# Altium PCB RevB.PcbDoc
Units mm, origin at the board's own origin, x right, y up, seen from the top; angles counter-clockwise.
Board outline 45 x 45 mm, 2 copper layers (Top Layer, Bottom Layer); 73 components, 78 nets, 294 pads, 41 vias.
Unrouted connection lines stored in the file: 18.
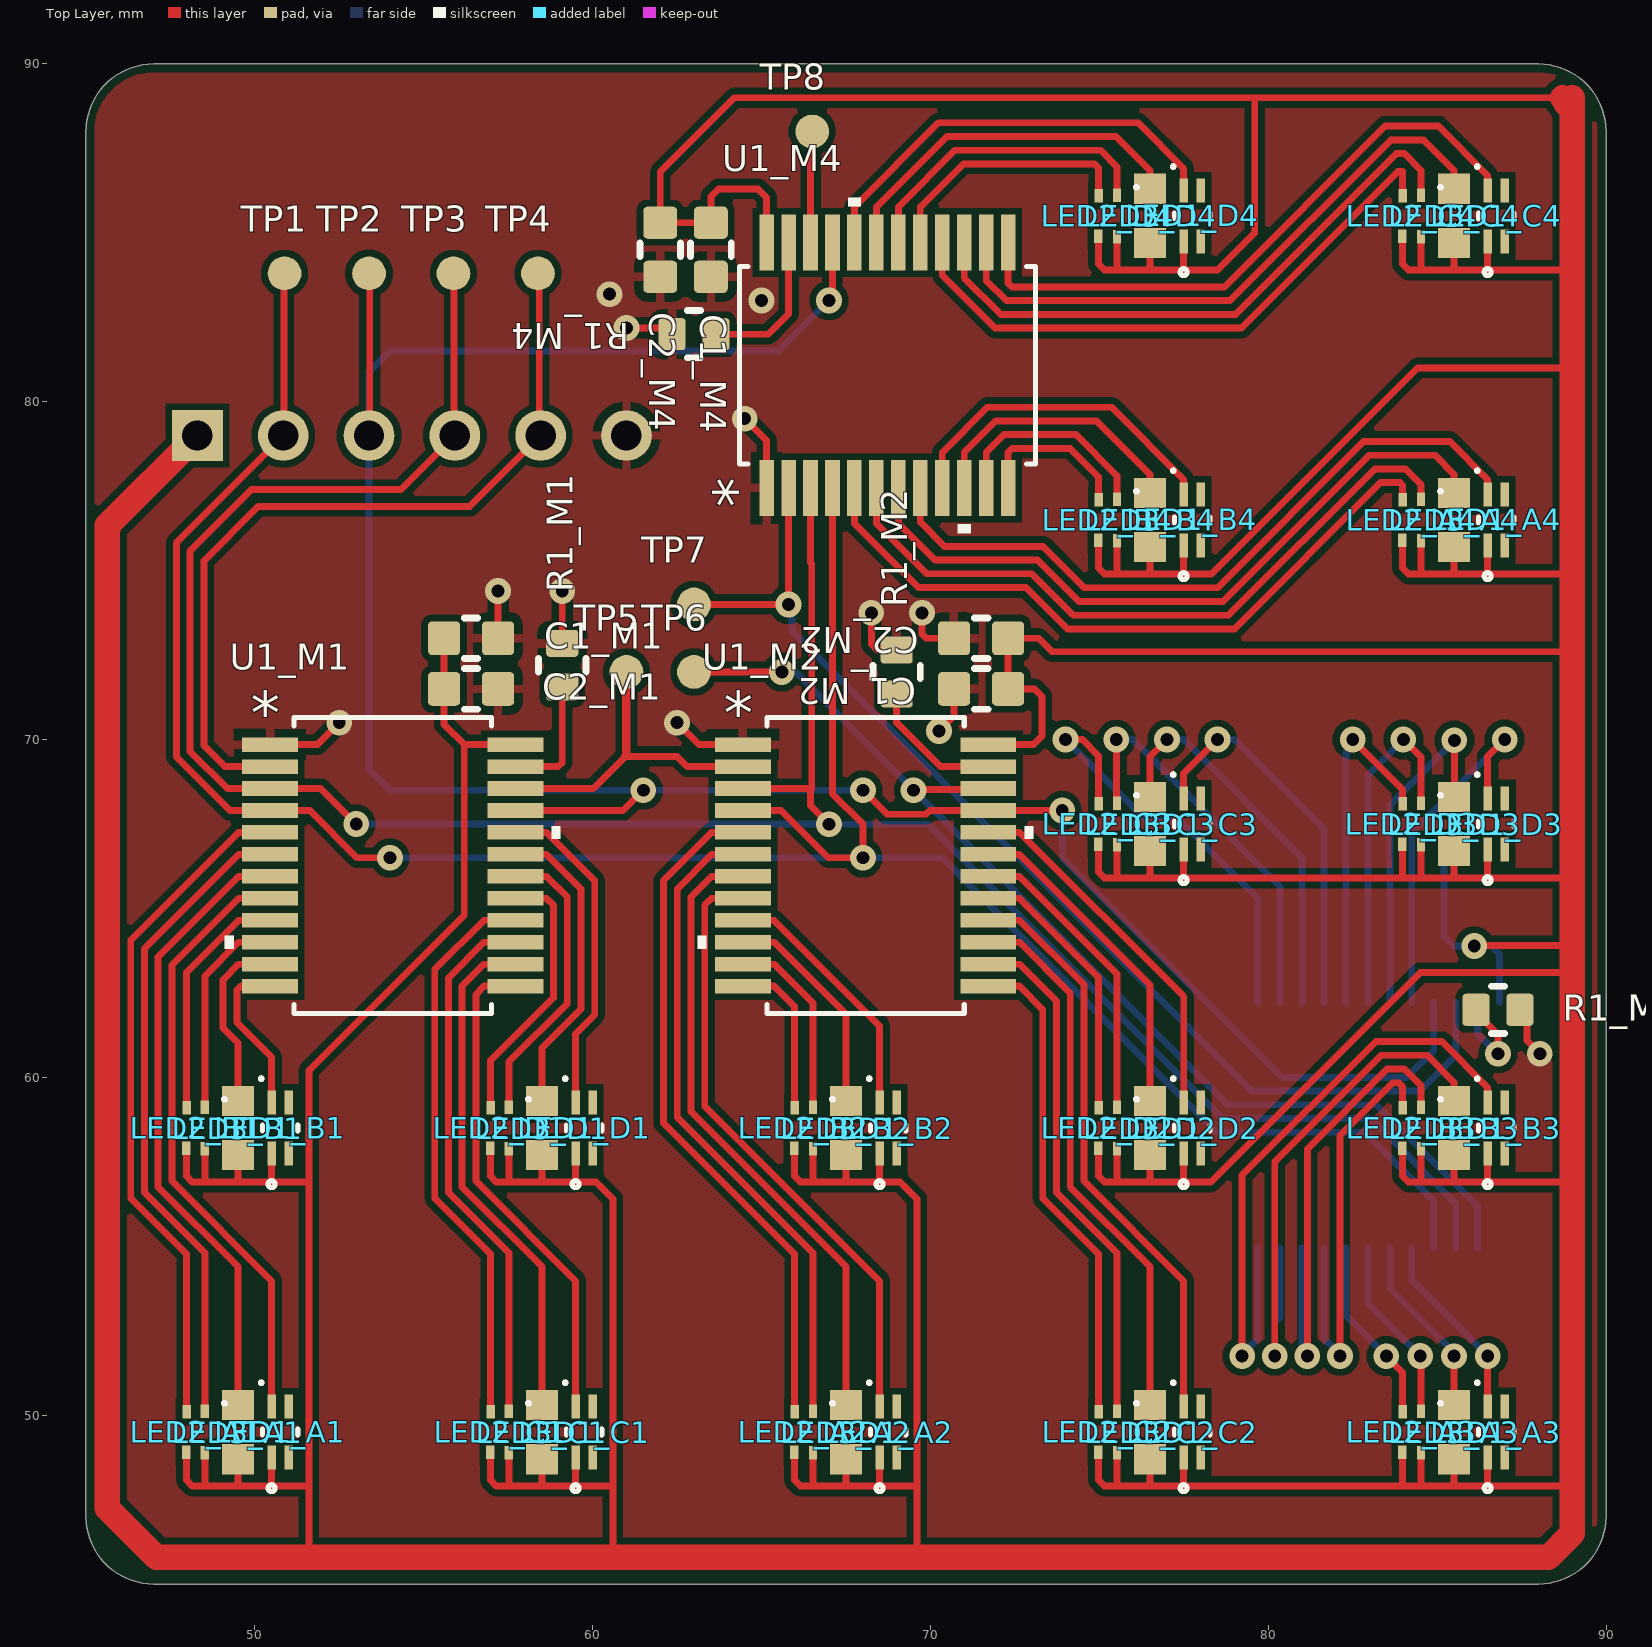
[diagram p0: Top Layer view]
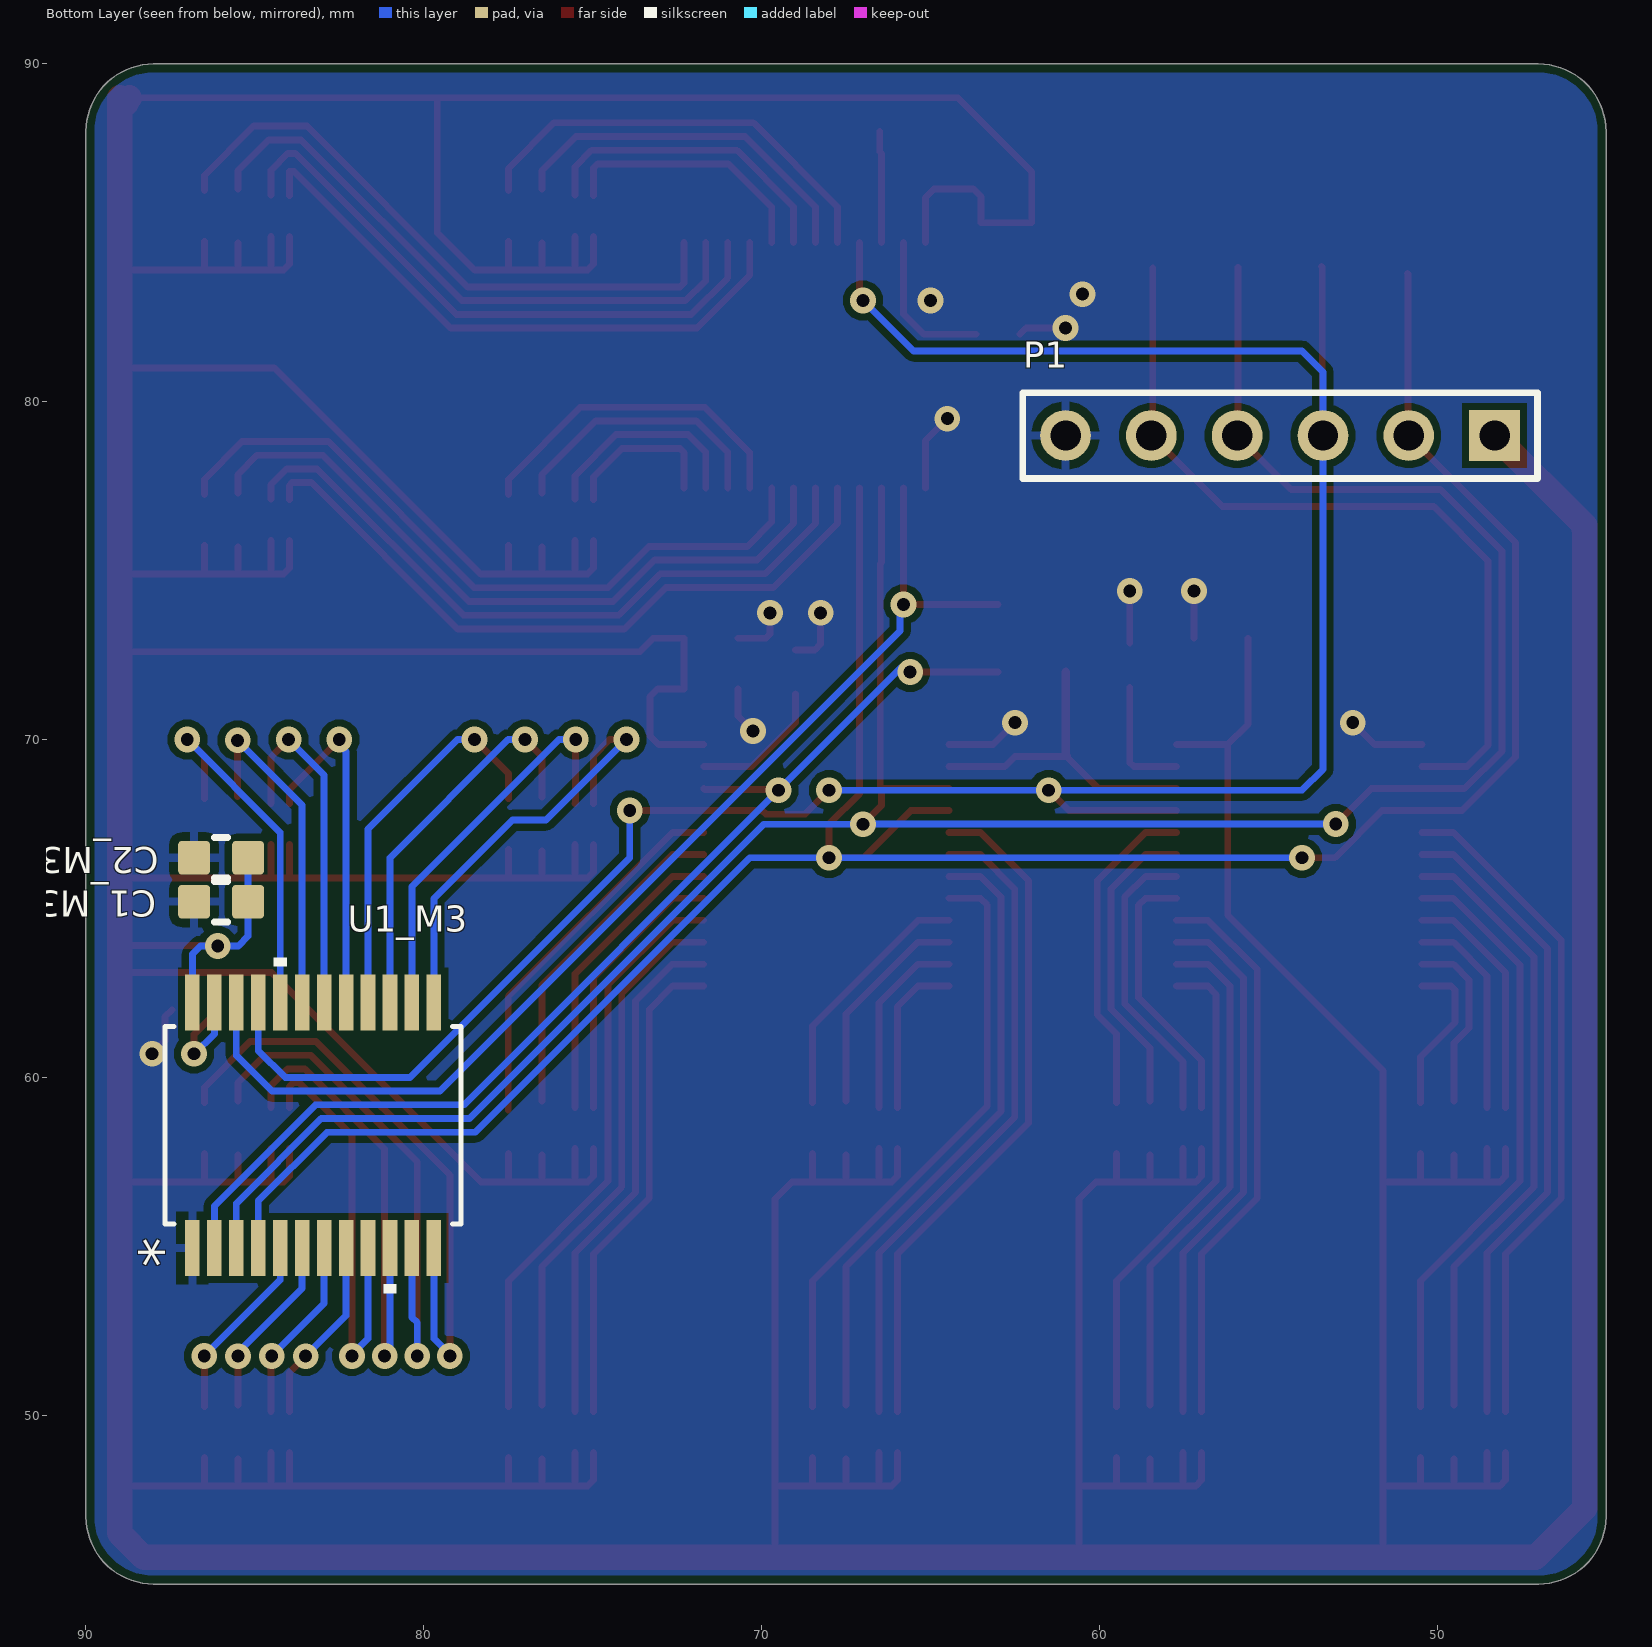
[diagram p1: Bottom Layer view, seen from below]
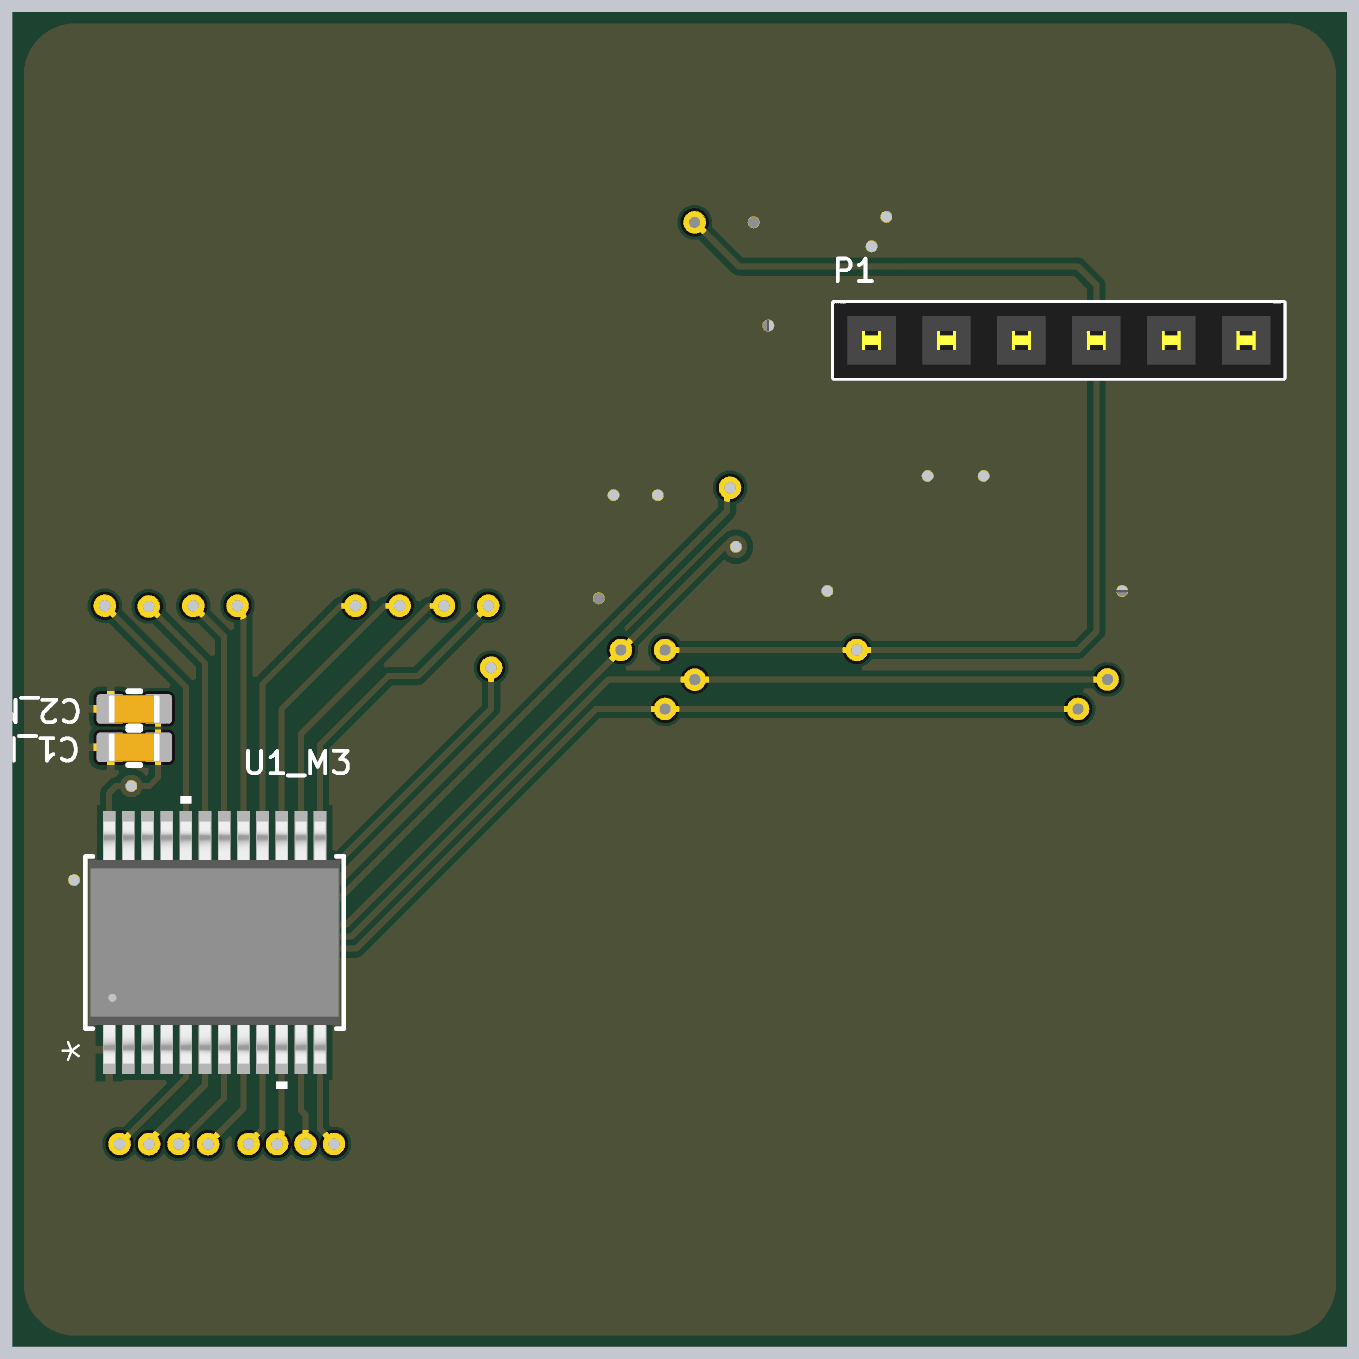
[diagram p2: 3D render of the assembled board from below, using the file's embedded part models]

## Layer stack, top to bottom
Top Solder: solder mask 0.0102, Solder Resist, Dk 3.5
Top Layer: signal copper 0.0356
Dielectric 1: dielectric 0.32, FR-4, Dk 4.8
Bottom Layer: signal copper 0.0356
Bottom Solder: solder mask 0.0102, Solder Resist, Dk 3.5

## Board outline
47,45 cw(c47,47) 45,47 45,87.997 cw(c47.003,87.997) 47.003,90 88,90 cw(c88,88) 90,88 90,47 cw(c88,47) 88,45

## Design rules (kind name [scope] priority, off if disabled: settings)
BoardOutlineClearance [All] p1: gap=0.254 ignorepadtopadclearanceinfootprint=FALSE except(0: Arc-SplitContinuation Track-SplitContinuation SMDPad-SplitContinuation THPad-SplitContinuation Via-SplitContinuation Fill-SplitContinuation Poly-SplitContinuation Region-SplitContinuation Text-SplitContinuation)
Clearance [All] p1: gap=0.203 ignorepadtopadclearanceinfootprint=TRUE
FabricationTestpoint [All] p1: side=3 testpointundercomponent=TRUE minsize=1.016 maxsize=2.54 preferedsize=1.524 minholesize=0 maxholesize=1.016 preferedholesize=0.813 testpointgrid=0.025 allowsidetop=TRUE allowsidebottom=TRUE usegrid=TRUE gridtolerance=0 compbodyclearance=0.152 boardedgeclearance=0.254
PolygonConnect [All] p1: connectstyle=Relief reliefconductorwidth=0.254 reliefentries=4 polygonreliefangle="90 Angle" airgapwidth=0.254
RoomDefinition M3 [InComponentClass('M3')] p1: confinementstyle=ConfineIn formatcopy=TRUE lockcomponents=FALSE outline 78,53 90,53 90,67.5 78,67.5
RoomDefinition A4 [InComponentClass('A4')] p2: confinementstyle=ConfineIn formatcopy=TRUE lockcomponents=FALSE outline 83,74 88,74 88,79 83,79
RoomDefinition C3 [InComponentClass('C3')] p3: confinementstyle=ConfineIn formatcopy=TRUE lockcomponents=FALSE outline 74,65 79,65 79,70 74,70
RoomDefinition D3 [InComponentClass('D3')] p4: confinementstyle=ConfineIn formatcopy=TRUE lockcomponents=FALSE outline 83,65 88,65 88,70 83,70
RoomDefinition B3 [InComponentClass('B3')] p5: confinementstyle=ConfineIn formatcopy=TRUE lockcomponents=FALSE outline 83,56 88,56 88,61 83,61
RoomDefinition A3 [InComponentClass('A3')] p6: confinementstyle=ConfineIn formatcopy=TRUE lockcomponents=FALSE outline 83,47 88,47 88,52 83,52
RoomDefinition M4 [InComponentClass('M4')] p7: confinementstyle=ConfineIn formatcopy=TRUE lockcomponents=FALSE outline 74,75 74,87 60,87 60,75
RoomDefinition A1 [InComponentClass('A1')] p8: confinementstyle=ConfineIn formatcopy=TRUE lockcomponents=FALSE outline 47,47 52,47 52,52 47,52
RoomDefinition A2 [InComponentClass('A2')] p9: confinementstyle=ConfineIn formatcopy=TRUE lockcomponents=FALSE outline 65,47 70,47 70,52 65,52
RoomDefinition B1 [InComponentClass('B1')] p10: confinementstyle=ConfineIn formatcopy=TRUE lockcomponents=FALSE outline 47,56 52,56 52,61 47,61
RoomDefinition B2 [InComponentClass('B2')] p11: confinementstyle=ConfineIn formatcopy=TRUE lockcomponents=FALSE outline 65,56 70,56 70,61 65,61
RoomDefinition B4 [InComponentClass('B4')] p12: confinementstyle=ConfineIn formatcopy=TRUE lockcomponents=FALSE outline 74,74 79,74 79,79 74,79
RoomDefinition C1 [InComponentClass('C1')] p13: confinementstyle=ConfineIn formatcopy=TRUE lockcomponents=FALSE outline 56,47 61,47 61,52 56,52
RoomDefinition C2 [InComponentClass('C2')] p14: confinementstyle=ConfineIn formatcopy=TRUE lockcomponents=FALSE outline 74,47 79,47 79,52 74,52
RoomDefinition C4 [InComponentClass('C4')] p15: confinementstyle=ConfineIn formatcopy=TRUE lockcomponents=FALSE outline 83,83 88,83 88,88 83,88
RoomDefinition D1 [InComponentClass('D1')] p16: confinementstyle=ConfineIn formatcopy=TRUE lockcomponents=FALSE outline 56,56 61,56 61,61 56,61
RoomDefinition D2 [InComponentClass('D2')] p17: confinementstyle=ConfineIn formatcopy=TRUE lockcomponents=FALSE outline 74,56 79,56 79,61 74,61
RoomDefinition D4 [InComponentClass('D4')] p18: confinementstyle=ConfineIn formatcopy=TRUE lockcomponents=FALSE outline 74,83 79,83 79,88 74,88
RoomDefinition M1 [InComponentClass('M1')] p19: confinementstyle=ConfineIn formatcopy=TRUE lockcomponents=FALSE outline 48,61 60,61 60,75 48,75
RoomDefinition M2 [InComponentClass('M2')] p20: confinementstyle=ConfineIn formatcopy=TRUE lockcomponents=FALSE outline 62,61 74,61 74,75 62,75
RoutingVias [All] p1: holewidth=0.381 width=0.762 viastyle="Through Hole" minholewidth=0.152 minwidth=0.406 maxholewidth=2.54 maxwidth=1.27
SMDEntry [All] p1: side=TRUE corner=TRUE anyangle=FALSE
SMDToCorner [All] p1: distance=39370
SolderMaskExpansion [All] p1: expansion=0.102 istentingtop=FALSE
UnRoutedNet [All] p1: checkbadconnections=TRUE
Width [All] p1: maxlimit=2.54 minlimit=0.152 preferedwidth=0.254
28 further rules are at their usual default settings.

## Classes and differential pairs
channel class Main: M1 M2 M3 M4
channel class LEDBlock: A1 A2 A3 A4 B1 B2 B3 B4 C1 C2 C3 C4 D1 D2 D3 D4
channel class LED: D11 D12 D13 D14
component class M4: C1_M4 C2_M4 R1_M4 U1_M4
component class M3: C1_M3 C2_M3 R1_M3 U1_M3
component class M2: C1_M2 C2_M2 R1_M2 U1_M2
component class M1: C1_M1 C2_M1 R1_M1 U1_M1
component class Interface: P1 TP1 TP2 TP3 TP4 TP5 TP6 TP7 TP8
component class D4: LED1_D4 LED2_D4 LED3_D4
component class D3: LED1_D3 LED2_D3 LED3_D3
component class D2: LED1_D2 LED2_D2 LED3_D2
component class D1: LED1_D1 LED2_D1 LED3_D1
component class C4: LED1_C4 LED2_C4 LED3_C4
component class C3: LED1_C3 LED2_C3 LED3_C3
component class C2: LED1_C2 LED2_C2 LED3_C2
component class C1: LED1_C1 LED2_C1 LED3_C1
component class B4: LED1_B4 LED2_B4 LED3_B4
component class B3: LED1_B3 LED2_B3 LED3_B3
component class B2: LED1_B2 LED2_B2 LED3_B2
component class B1: LED1_B1 LED2_B1 LED3_B1
component class A4: LED1_A4 LED2_A4 LED3_A4
component class A3: LED1_A3 LED2_A3 LED3_A3
component class A2: LED1_A2 LED2_A2 LED3_A2
component class A1: LED1_A1 LED2_A1 LED3_A1

## Components (designator, comment, footprint, x,y, rotation, side; value= is the part's Value field where it differs from the comment)
C1_M1 "Capacitor" C0603B 56.4,73 r0 top value=1u (schematic designator C1)
C1_M2 "Capacitor" C0603B 71.5,71.5 r180 top value=1u (schematic designator C1)
C1_M3 "Capacitor" C0603B 86,65.2 r0 bottom value=1u (schematic designator C1)
C1_M4 "Capacitor" C0603B 63.5,84.5 r270 top value=1u (schematic designator C1)
C2_M1 "Capacitor" C0603B 56.4,71.5 r0 top value=0.1u (schematic designator C2)
C2_M2 "Capacitor" C0603B 71.5,73 r180 top value=0.1u (schematic designator C2)
C2_M3 "Capacitor" C0603B 86,66.5 r0 bottom value=0.1u (schematic designator C2)
C2_M4 "Capacitor" C0603B 62,84.5 r270 top value=0.1u (schematic designator C2)
LED1_A1 "APHB1608CGKSEKC" APHB1608CGKSEKC_KNB 50.75,49.5 r90 top locked (schematic designator LED1)
LED1_A2 "APHB1608CGKSEKC" APHB1608CGKSEKC_KNB 68.75,49.5 r90 top locked (schematic designator LED1)
LED1_A3 "APHB1608CGKSEKC" APHB1608CGKSEKC_KNB 86.75,49.5 r90 top locked (schematic designator LED1)
LED1_A4 "APHB1608CGKSEKC" APHB1608CGKSEKC_KNB 86.75,76.5 r90 top locked (schematic designator LED1)
LED1_B1 "APHB1608CGKSEKC" APHB1608CGKSEKC_KNB 50.75,58.5 r90 top locked (schematic designator LED1)
LED1_B2 "APHB1608CGKSEKC" APHB1608CGKSEKC_KNB 68.75,58.5 r90 top locked (schematic designator LED1)
LED1_B3 "APHB1608CGKSEKC" APHB1608CGKSEKC_KNB 86.75,58.5 r90 top locked (schematic designator LED1)
LED1_B4 "APHB1608CGKSEKC" APHB1608CGKSEKC_KNB 77.75,76.5 r90 top locked (schematic designator LED1)
LED1_C1 "APHB1608CGKSEKC" APHB1608CGKSEKC_KNB 59.75,49.5 r90 top locked (schematic designator LED1)
LED1_C2 "APHB1608CGKSEKC" APHB1608CGKSEKC_KNB 77.75,49.5 r90 top locked (schematic designator LED1)
LED1_C3 "APHB1608CGKSEKC" APHB1608CGKSEKC_KNB 77.75,67.5 r90 top locked (schematic designator LED1)
LED1_C4 "APHB1608CGKSEKC" APHB1608CGKSEKC_KNB 86.75,85.5 r90 top locked (schematic designator LED1)
LED1_D1 "APHB1608CGKSEKC" APHB1608CGKSEKC_KNB 59.75,58.5 r90 top locked (schematic designator LED1)
LED1_D2 "APHB1608CGKSEKC" APHB1608CGKSEKC_KNB 77.75,58.5 r90 top locked (schematic designator LED1)
LED1_D3 "APHB1608CGKSEKC" APHB1608CGKSEKC_KNB 86.75,67.5 r90 top locked (schematic designator LED1)
LED1_D4 "APHB1608CGKSEKC" APHB1608CGKSEKC_KNB 77.75,85.5 r90 top locked (schematic designator LED1)
LED2_A1 "QBLP601-RIB" DFN65P160X55-4N 48.25,49.5 r270 top locked (schematic designator LED2)
LED2_A2 "QBLP601-RIB" DFN65P160X55-4N 66.25,49.5 r270 top locked (schematic designator LED2)
LED2_A3 "QBLP601-RIB" DFN65P160X55-4N 84.25,49.5 r270 top locked (schematic designator LED2)
LED2_A4 "QBLP601-RIB" DFN65P160X55-4N 84.25,76.5 r270 top locked (schematic designator LED2)
LED2_B1 "QBLP601-RIB" DFN65P160X55-4N 48.25,58.5 r270 top locked (schematic designator LED2)
LED2_B2 "QBLP601-RIB" DFN65P160X55-4N 66.25,58.5 r270 top locked (schematic designator LED2)
LED2_B3 "QBLP601-RIB" DFN65P160X55-4N 84.25,58.5 r270 top locked (schematic designator LED2)
LED2_B4 "QBLP601-RIB" DFN65P160X55-4N 75.25,76.5 r270 top locked (schematic designator LED2)
LED2_C1 "QBLP601-RIB" DFN65P160X55-4N 57.25,49.5 r270 top locked (schematic designator LED2)
LED2_C2 "QBLP601-RIB" DFN65P160X55-4N 75.25,49.5 r270 top locked (schematic designator LED2)
LED2_C3 "QBLP601-RIB" DFN65P160X55-4N 75.25,67.5 r270 top locked (schematic designator LED2)
LED2_C4 "QBLP601-RIB" DFN65P160X55-4N 84.25,85.5 r270 top locked (schematic designator LED2)
LED2_D1 "QBLP601-RIB" DFN65P160X55-4N 57.25,58.5 r270 top locked (schematic designator LED2)
LED2_D2 "QBLP601-RIB" DFN65P160X55-4N 75.25,58.5 r270 top locked (schematic designator LED2)
LED2_D3 "QBLP601-RIB" DFN65P160X55-4N 84.25,67.5 r270 top locked (schematic designator LED2)
LED2_D4 "QBLP601-RIB" DFN65P160X55-4N 75.25,85.5 r270 top locked (schematic designator LED2)
LED3_A1 "B18W1IRP-A1C0001X4U1930" CAPCP1608X10N 49.5,49.5 r270 top locked (schematic designator LED3)
LED3_A2 "B18W1IRP-A1C0001X4U1930" CAPCP1608X10N 67.5,49.5 r270 top locked (schematic designator LED3)
LED3_A3 "B18W1IRP-A1C0001X4U1930" CAPCP1608X10N 85.5,49.5 r270 top locked (schematic designator LED3)
LED3_A4 "B18W1IRP-A1C0001X4U1930" CAPCP1608X10N 85.5,76.5 r270 top locked (schematic designator LED3)
LED3_B1 "B18W1IRP-A1C0001X4U1930" CAPCP1608X10N 49.5,58.5 r270 top locked (schematic designator LED3)
LED3_B2 "B18W1IRP-A1C0001X4U1930" CAPCP1608X10N 67.5,58.5 r270 top locked (schematic designator LED3)
LED3_B3 "B18W1IRP-A1C0001X4U1930" CAPCP1608X10N 85.5,58.5 r270 top locked (schematic designator LED3)
LED3_B4 "B18W1IRP-A1C0001X4U1930" CAPCP1608X10N 76.5,76.5 r270 top locked (schematic designator LED3)
LED3_C1 "B18W1IRP-A1C0001X4U1930" CAPCP1608X10N 58.5,49.5 r270 top locked (schematic designator LED3)
LED3_C2 "B18W1IRP-A1C0001X4U1930" CAPCP1608X10N 76.5,49.5 r270 top locked (schematic designator LED3)
LED3_C3 "B18W1IRP-A1C0001X4U1930" CAPCP1608X10N 76.5,67.5 r270 top locked (schematic designator LED3)
LED3_C4 "B18W1IRP-A1C0001X4U1930" CAPCP1608X10N 85.5,85.5 r270 top locked (schematic designator LED3)
LED3_D1 "B18W1IRP-A1C0001X4U1930" CAPCP1608X10N 58.5,58.5 r270 top locked (schematic designator LED3)
LED3_D2 "B18W1IRP-A1C0001X4U1930" CAPCP1608X10N 76.5,58.5 r270 top locked (schematic designator LED3)
LED3_D3 "B18W1IRP-A1C0001X4U1930" CAPCP1608X10N 85.5,67.5 r270 top locked (schematic designator LED3)
LED3_D4 "B18W1IRP-A1C0001X4U1930" CAPCP1608X10N 76.5,85.5 r270 top locked (schematic designator LED3)
P1 "Header 6" HDR1X6 48.3,79 r0 bottom
R1_M1 "Resistor" R0603B 59.1,72.2 r90 top value=2k (schematic designator R1)
R1_M2 "Resistor" R0603B 69,72 r90 top value=2k (schematic designator R1)
R1_M3 "Resistor" R0603B 86.8,62 r0 top value=2k (schematic designator R1)
R1_M4 "Resistor" R0603B 63,82 r180 top value=2k (schematic designator R1)
TP1 "Test Point" TP-SMT-1mm 50.88,83.8 r180 top
TP2 "Test Point" TP-SMT-1mm 53.38,83.8 r180 top
TP3 "Test Point" TP-SMT-1mm 55.88,83.8 r180 top
TP4 "Test Point" TP-SMT-1mm 58.38,83.8 r180 top
TP5 "Test Point" TP-SMT-1mm 61,72 r0 top
TP6 "Test Point" TP-SMT-1mm 63,72 r0 top
TP7 "Test Point" TP-SMT-1mm 63,74 r0 top
TP8 "Test Point" TP-SMT-1mm 66.5,88 r270 top
U1_M1 "IS31FL3726A-SALS4-TR" SSOP-24_LMS 54.08,66.275 r0 top (schematic designator U1)
U1_M2 "IS31FL3726A-SALS4-TR" SSOP-24_LMS 68.08,66.275 r0 top (schematic designator U1)
U1_M3 "IS31FL3726A-SALS4-TR" SSOP-24_LMS 83.275,58.58 r90 bottom (schematic designator U1)
U1_M4 "IS31FL3726A-SALS4-TR" SSOP-24_LMS 68.725,81.08 r90 top (schematic designator U1)

## Footprints (in the part's own frame and the unit in brackets; to place one, negate y for a bottom-side part, rotate by r counter-clockwise, add the part's x,y. Pads: shape width x height; smd on the part's side, far side on the other; paste and mask are expansions set on the pad)
APHB1608CGKSEKC_KNB [mil]
  rect 28x10 smd paste+0 mask+0: 1(-29.5,10) 2(29.5,10) 3(-29.5,-10) 4(29.5,-10)
  silkscreen extent -69,-20 4,20, body extent -31,-16 31,16, height 32
C0603B [mm] "Chip Capacitor, 0603, 2-Leads, Body 1.60x0.80mm, IPC Medium Density"
  rrect25% 0.95x1 smd: 1(-0.8,0) 2(0.8,0)
  silkscreen extent -0.2,-0.6 0.2,0.6, body extent -0.87,-0.48 0.87,0.48, height 0.87
CAPCP1608X10N [mm] "Chip Capacitor, 2-Leads, Body 1.60x0.80mm, IPC Medium Density"
  rect 0.9x0.95 smd: 1(-0.8,0) 2(0.8,0)
  silkscreen extent -1.51,0.64 -1.41,0.74, body extent -0.85,-0.45 0.85,0.45, height 0.95
DFN65P160X55-4N [mm] "DFN, 4-Leads, Body 0.80x1.60mm, Pitch 0.65mm, IPC Medium Density"
  rect 0.4x0.25 smd: 1(0.608,0.272) 2(0.605,-0.277) 3(-0.612,0.272) 4(-0.6,-0.272)
  silkscreen extent -0.9,0.8 -0.8,0.9, body extent -0.85,-0.45 0.85,0.45, height 0.55
HDR1X6 [mm] "Connector; Header; 6 Position"
  rect 1.5x1.5 hole 0.9: 1(0,0)
  round 1.5 hole 0.9: 2(2.54,0) 3(5.08,0) 4(7.62,0) 5(10.16,0) 6(12.7,0)
  silkscreen extent -1.27,-1.27 13.97,1.27, body extent -1.27,-1.27 13.97,1.27, height 8.89
R0603B [mm] "Chip Resistor, 0603, 2-Leads, Body 1.58x0.85mm, IPC Medium Density"
  rrect25% 0.8x0.95 smd: 1(-0.65,0) 2(0.65,0)
  silkscreen extent -0.2,-0.7 0.2,0.7, body extent -0.82,-0.48 0.82,0.48, height 0.5
SSOP-24_LMS [mil]
  rect 65x17 smd paste+0 mask+0: 1(-143,140.75) 2(-143,115.16) 3(-143,89.57) 4(-143,63.98) 5(-143,38.39) 6(-143,12.8) 7(-143,-12.8) 8(-143,-38.39) 9(-143,-63.98) 10(-143,-89.57) 11(-143,-115.16) 12(-143,-140.75) 13(143,-140.75) 14(143,-115.16) 15(143,-89.57) 16(143,-63.98) 17(143,-38.39) 18(143,-12.8) 19(143,12.8) 20(143,38.39) 21(143,63.98) 22(143,89.57) 23(143,115.16) 24(143,140.75)
  silkscreen extent -196,-172 196,172, body extent -161,-167 161,167, height 79
TP-SMT-1mm [mm] "1mm diameter test point pad"
  round 1 smd: 1(0,0)

## Part data
C1_M1 C1_M2 C1_M3 C1_M4 C2_M1 C2_M2 C2_M3 C2_M4: library part CMP-001-00000-10, "Non-polarized capacitor"
LED1_A1 LED1_A2 LED1_A3 LED1_A4 LED1_B1 LED1_B2 LED1_B3 LED1_B4 LED1_C1 LED1_C2 LED1_C3 LED1_C4 LED1_D1 LED1_D2 LED1_D3 LED1_D4: library part CMP-007-00006-3, "Dual Color LED, Super Bright Orange/green, Water Clear, 1.6mm", Mfr_Name=Kingbright, Design Item ID=APHB1608CGKSEKC, RoHS Compliant=Yes, Source=APHB1608CGKSEKC.SchLib
LED2_A1 LED2_A2 LED2_A3 LED2_A4 LED2_B1 LED2_B2 LED2_B3 LED2_B4 LED2_C1 LED2_C2 LED2_C3 LED2_C4 LED2_D1 LED2_D2 LED2_D3 LED2_D4: library part CMP-007-00009-2, "Blue, Red 470nm Blue, 630nm Red LED Indication - Discrete 3.1V Blue, 2V Red 0603 (1608 Metric)"
LED3_A1 LED3_A2 LED3_A3 LED3_A4 LED3_B1 LED3_B2 LED3_B3 LED3_B4 LED3_C1 LED3_C2 LED3_C3 LED3_C4 LED3_D1 LED3_D2 LED3_D3 LED3_D4: library part CMP-007-00008-2, "Infrared (IR) Emitter 850nm 1.7V 100mA 23mW/sr @ 100mA (Typ) 80° 0603 (1608 Metric)"
P1: library part CMP-005-000107-2, "Header, 6-Pin", Component Type=Standard, Design Item ID="Header 6", LatestRevisionDate=17-Jul-2002, LatestRevisionNote="Re-released for DXP Platform.", Pin Count=6, Publisher="Altium Limited", Source="Miscellaneous Connectors.SchLib"
R1_M1 R1_M2 R1_M3 R1_M4: library part CMP-009-00002-14
TP1 TP2 TP3 TP4 TP5 TP6 TP7 TP8: library part CMP-002-00006-5, "In circuit test point for a net"
U1_M1 U1_M2 U1_M3 U1_M4: library part CMP-184-000001-2, "LED Driver IC 16 Output Linear Shift Register No Dimming 25.2mA 24-eTSSOP", Mfr_Name="Lumissil Microsystems", Design Item ID=IS31FL3726A-SALS4-TR, RefDes=RefDes, Source=IS31FL3726A-SALS4-TR.SchLib, Type=Type

## Via types
v1: diameter 0.762, hole 0.381, Top Layer to Bottom Layer, 26 vias
v2: diameter 0.762, hole 0.381, Top Layer to Bottom Layer, tented both sides, 15 vias

## Nets (pads, with @x,y where several pads share a name; then routed paths per layer and width w, separated by ;. In a path a pad name is that pad's centre, name@x,y a point inside that pad or via, vN(x,y) a via of type N, cw(c..) or ccw(c..) an arc to the next point about the centre after c; other vN are vias at no path point)
+3.3: C1_M1.1 C1_M2.1 C1_M3.1 C1_M4.1 C2_M1.1 C2_M2.1 C2_M3.1 C2_M4.1 LED1_A1.1 LED1_A2.1 LED1_A3.1 LED1_A4.1 LED1_B1.1 LED1_B2.1 LED1_B3.1 LED1_B4.1 LED1_C1.1 LED1_C2.1 LED1_C3.1 LED1_C4.1 LED1_D1.1 LED1_D2.1 LED1_D3.1 LED1_D4.1 LED2_A1.1 LED2_A1.2 LED2_A2.1 LED2_A2.2 LED2_A3.1 LED2_A3.2 LED2_A4.1 LED2_A4.2 LED2_B1.1 LED2_B1.2 LED2_B2.1 LED2_B2.2 LED2_B3.1 LED2_B3.2 LED2_B4.1 LED2_B4.2 LED2_C1.1 LED2_C1.2 LED2_C2.1 LED2_C2.2 LED2_C3.1 LED2_C3.2 LED2_C4.1 LED2_C4.2 LED2_D1.1 LED2_D1.2 LED2_D2.1 LED2_D2.2 LED2_D3.1 LED2_D3.2 LED2_D4.1 LED2_D4.2 LED3_A1.2 LED3_A2.2 LED3_A3.2 LED3_A4.2 LED3_B1.2 LED3_B2.2 LED3_B3.2 LED3_B4.2 LED3_C1.2 LED3_C2.2 LED3_C3.2 LED3_C4.2 LED3_D1.2 LED3_D2.2 LED3_D3.2 LED3_D4.2 P1.1 U1_M1.24 U1_M2.24 U1_M3.24 U1_M4.24 | length 401.5
  Top Layer w0.2: 79.6,89 88.71,89
  Top Layer w0.203: LED2_A1.2 47.973,48.073 48.146,47.9 48.5,47.9 ; LED2_B1.2 47.973,57.073 48.146,56.9 48.5,56.9 ; LED2_A1.1 48.522,47.922 48.5,47.9 ; LED2_B1.1 48.522,56.922 48.5,56.9 ; LED3_A1.2 49.5,47.9 ; LED3_B1.2 49.5,56.9 ; LED1_A1.1 50.496,47.904 50.5,47.9 ; LED1_B1.1 50.496,56.904 ; 51.6,45.791 51.6,47.9 ; 51.6,56.9 51.596,56.904 50.496,56.904 ; C1_M1.1 55.6,72.4 55.6,70.45 56.2,69.85 ; LED2_C1.2 56.973,48.073 57.146,47.9 57.5,47.9 ; LED2_D1.2 56.973,57.073 57.146,56.9 57.5,56.9 ; LED2_C1.1 57.522,47.922 57.5,47.9 ; LED2_D1.1 57.522,56.922 57.5,56.9 ; U1_M1.24 56.2,69.85 ; LED3_C1.2 58.5,47.9 ; LED3_D1.2 58.5,56.9 ; LED1_C1.1 59.496,47.904 59.5,47.9 ; LED1_D1.1 59.496,56.904 ; 60.5,47.9 59.5,47.9 ; 60.6,45.791 60.6,47.9 60.6,56.4 60.096,56.904 59.496,56.904 ; U1_M4.24 65.15,86.05 64.9,86.3 63.723,86.3 63.5,86.077 C1_M4.1 C2_M4.1 62,86.8 64.2,89 79.6,89 79.6,85 78.5,83.9 77.5,83.9 ; LED2_A2.2 65.973,48.073 66.146,47.9 66.5,47.9 ; LED2_B2.2 65.973,57.073 66.146,56.9 66.5,56.9 ; LED2_A2.1 66.522,47.922 66.5,47.9 ; LED2_B2.1 66.522,56.922 66.5,56.9 ; LED3_A2.2 67.5,47.9 ; LED3_B2.2 67.5,56.9 ; LED1_A2.1 68.496,47.904 68.5,47.9 ; LED1_B2.1 68.496,56.904 ; 69.5,47.9 68.5,47.9 ; 69.6,45.791 69.6,47.9 69.6,56.4 69.096,56.904 68.496,56.904 ; U1_M2.24 73.05,69.85 73.3,70.1 73.3,71.277 73.077,71.5 C1_M2.1 C2_M2.1 73.2,73 73.6,72.6 89,72.6 ; LED2_C2.2 74.973,48.073 75.146,47.9 75.5,47.9 ; LED2_D2.2 74.973,57.073 75.146,56.9 75.5,56.9 ; LED2_C3.2 74.973,66.073 75.146,65.9 75.5,65.9 ; LED2_B4.2 74.973,75.073 75.146,74.9 75.5,74.9 ; LED2_D4.2 74.973,84.073 75.146,83.9 75.5,83.9 ; LED2_C2.1 75.522,47.922 75.5,47.9 ; LED2_D2.1 75.522,56.922 75.5,56.9 ; LED2_C3.1 75.522,65.922 75.5,65.9 ; LED2_B4.1 75.522,74.922 75.5,74.9 ; LED2_D4.1 75.522,83.922 75.5,83.9 ; LED3_C2.2 76.5,47.9 ; LED3_D2.2 76.5,56.9 ; LED3_C3.2 76.5,65.9 ; LED3_B4.2 76.5,74.9 ; LED3_D4.2 76.5,83.9 ; LED1_C2.1 77.496,47.904 77.5,47.9 ; LED1_D2.1 77.496,56.904 77.5,56.9 ; LED1_C3.1 77.496,65.904 77.5,65.9 ; LED1_B4.1 77.496,74.904 77.5,74.9 ; LED1_D4.1 77.496,83.904 77.5,83.9 ; LED2_A3.2 83.973,47.9 ; LED2_B3.2 83.973,57.073 84.146,56.9 84.5,56.9 ; LED2_D3.2 83.973,65.9 ; LED2_A4.2 83.973,75.073 84.146,74.9 84.5,74.9 ; LED2_C4.2 83.973,84.073 84.146,83.9 84.5,83.9 ; LED2_A3.1 84.522,47.922 84.5,47.9 ; LED2_B3.1 84.522,56.922 84.5,56.9 ; LED2_D3.1 84.522,65.922 84.5,65.9 ; LED2_A4.1 84.522,74.922 84.5,74.9 ; LED2_C4.1 84.522,83.922 84.5,83.9 ; LED3_A3.2 85.5,47.9 ; LED3_B3.2 85.5,56.9 ; LED3_D3.2 85.5,65.9 ; LED3_A4.2 85.5,74.9 ; LED3_C4.2 85.5,83.9 ; v2(86.1,63.888) 86.112,63.9 89,63.9 ; LED1_A3.1 86.496,47.904 86.5,47.9 ; LED1_B3.1 86.496,56.904 86.5,56.9 ; LED1_D3.1 86.496,65.904 86.5,65.9 ; LED1_A4.1 86.496,74.904 86.5,74.9 ; LED1_C4.1 86.496,83.904 86.5,83.9 ; 89,47.9 86.5,47.9 ; 89,56.9 86.5,56.9 ; 89,63.1 84.5,63.1 78.3,56.9 77.5,56.9 ; 89,65.9 86.5,65.9 ; 89,74.9 86.5,74.9 ; 89,81 84.425,81 78.325,74.9 77.5,74.9 ; 89,83.9 86.5,83.9 ; 48.5,47.9 49.5,47.9 ; 48.5,56.9 49.5,56.9 ; 49.5,47.9 50.5,47.9 ; 49.5,56.9 50.5,56.9 50.496,56.904 ; 50.5,47.9 51.6,47.9 ; 51.6,47.9 51.6,60.2 56.2,64.8 56.2,69.85 ; 57.5,47.9 58.5,47.9 ; 57.5,56.9 58.5,56.9 ; 58.5,47.9 59.5,47.9 ; 58.5,56.9 59.5,56.9 59.496,56.904 ; 66.5,47.9 67.5,47.9 ; 66.5,56.9 67.5,56.9 ; 67.5,47.9 68.5,47.9 ; 67.5,56.9 68.5,56.9 68.496,56.904 ; 75.5,47.9 76.5,47.9 ; 75.5,56.9 76.5,56.9 ; 75.5,65.9 76.5,65.9 ; 75.5,74.9 76.5,74.9 ; 75.5,83.9 76.5,83.9 ; 76.5,47.9 77.5,47.9 ; 76.5,56.9 77.5,56.9 ; 76.5,65.9 77.5,65.9 ; 76.5,74.9 77.5,74.9 ; 76.5,83.9 77.5,83.9 ; 77.5,47.9 83.973,47.9 ; 77.5,65.9 83.973,65.9 ; 83.973,47.9 84.5,47.9 ; 83.973,65.9 84.5,65.9 ; 84.5,47.9 85.5,47.9 ; 84.5,56.9 85.5,56.9 ; 84.5,65.9 85.5,65.9 ; 84.5,74.9 85.5,74.9 ; 84.5,83.9 85.5,83.9 ; 85.5,47.9 86.5,47.9 ; 85.5,56.9 86.5,56.9 ; 85.5,65.9 86.5,65.9 ; 85.5,74.9 86.5,74.9 ; 85.5,83.9 86.5,83.9
  Top Layer w0.75: 45.635,76.2 45.629,76.194 45.629,47.248 47.086,45.791 51.6,45.791 60.6,45.791 69.6,45.791 88.291,45.791 89,46.5 89,47.9 89,56.9 89,63.1 89,63.9 89,65.9 89,72.6 89,74.9 89,81 89,83.9 89,89 ; 88.71,89 88.827,88.883 88.827,88.827
  Top Layer w0.762: 45.635,76.2 45.635,76.335 P1.1
  Bottom Layer w0.203: C2_M3.1@85.2,66.4 C1_M3.1 85.2,64.178 85.49,63.888 85.912,63.888 v2@86,63.8 ; v2(86.1,63.888) 86.612,63.888 86.85,63.65 U1_M3.24
ENABLE: P1.3 TP2.1 U1_M1.21 U1_M2.21 U1_M3.21 U1_M4.21 | length 75.1
  Top Layer w0.203: P1.3 53.4,79.02 53.4,83.98 TP2.1@53.42,84 ; U1_M1.21 60.9,67.9 v1(61.5,68.5) ; v1(67,83) 67,83.137 67.1,83.237 U1_M4.21 ; v1@67.971,68.529 v1(68,68.5) 68.711,67.789 69.876,67.789 69.987,67.9 U1_M2.21 v1(73.9,67.9)
  Bottom Layer w0.203: v1(67,83) 65.5,81.5 54,81.5 53.38,80.88 P1.3 53.38,69.12 54,68.5 v1(61.5,68.5) v1(68,68.5) ; v1(73.9,67.9) 73.9,66.504 80.404,60 84.1,60 84.9,60.8 U1_M3.21
GND: C1_M1.2 C1_M2.2 C1_M3.2 C1_M4.2 C2_M1.2 C2_M2.2 C2_M3.2 C2_M4.2 P1.6 R1_M1.2 R1_M2.2 R1_M3.2 R1_M4.2 U1_M1.1 U1_M2.1 U1_M3.1 U1_M4.1 | length 17.6
  Top Layer w0.203: U1_M1.1 51.85,69.85 v2(52.5,70.5) ; C1_M1.2 57.2,73.6 v2(57.2,74.4) ; R1_M1.2 v2(59.1,74.4) ; v2(61,82.186) 62.164,82.186 R1_M4.2 ; v2(62.5,70.5) 63.15,69.85 U1_M2.1 ; v2(64.5,79.5) 65.15,78.85 U1_M4.1 ; v2(68.25,73.75) 68.25,72.825 68.425,72.65 R1_M2.2 ; v2(69.75,73.75) 69.75,73.119 69.869,73 C2_M2.2 ; v2(70.25,70.25) 70.7,70.7 C1_M2.2 ; R1_M3.2 87.656,61.794 87.656,61.085 v2(88.041,60.7)
  other v2: 65,83 60.5,83.186
LATCH: P1.2 TP1.1 U1_M1.4 U1_M2.4 U1_M3.4 U1_M4.4 | length 75.2
  Top Layer w0.203: TP1.1 50.86,83.78 50.86,79.02 47.678,75.838 47.678,69.482 49.26,67.9 51.63,67.9 53.03,66.5 v1(54,66.5) ; U1_M2.4 65.583,67.9 66.983,66.5 v1(68,66.5) 68,67.494 67.1,68.394 U1_M4.4
  Bottom Layer w0.203: v1(54,66.5) 70.351,66.5 78.476,58.374 82.867,58.374 84.9,56.342 U1_M3.4
NetR1_M1_1: R1_M1.1 U1_M1.23 | length 3.7
  Top Layer w0.203: U1_M1.23 58.981,69.2 59.1,69.319 R1_M1.1
NetR1_M2_1: R1_M2.1 U1_M2.23 | length 4.1
  Top Layer w0.203: R1_M2.1 69,70.5 70.3,69.2 U1_M2.23
NetR1_M3_1: R1_M3.1 U1_M3.23 | length 3.3
  Top Layer w0.203: R1_M3.1 86.15,61.925 86.8,61.275 v2(86.8,60.7)
  Bottom Layer w0.203: U1_M3.23 86.2,61.287 86.787,60.7 v2(86.8,60.7)
NetR1_M4_1: R1_M4.1 U1_M4.23 | length 4.5
  Top Layer w0.203: R1_M4.1 65.2,82 65.8,82.6 65.8,83.787 U1_M4.23
OUT0_D11: LED2_A1.3 U1_M1.6 | length 19.3
  Top Layer w0.203: LED2_A1.3 48.522,54.799 46.73,56.591 46.73,63.808 49.522,66.6 U1_M1.6
OUT0_D12: LED2_A2.3 U1_M2.6 | length 19.5
  Top Layer w0.203: U1_M2.6 63.522,66.6 62.505,65.582 62.505,58.817 66.522,54.799 LED2_A2.3
OUT0_D13: LED2_A3.3 U1_M3.7 | length 5.5
  Top Layer w0.203: v1(84.5,51.75) 84.522,51.728 LED2_A3.3
  Bottom Layer w0.203: U1_M3.7 82.95,53.75 82.95,53.3 v1(84.5,51.75)
OUT0_D14: LED2_A4.3 U1_M4.6 | length 20.7
  Top Layer w0.203: U1_M4.6 68.4,76.4 69.894,74.906 73,74.906 74.226,73.681 78.83,73.681 83.16,78.011 84.064,78.011 84.522,77.552 LED2_A4.3
OUT1_D11: LED1_A1.2 U1_M1.8 | length 18
  Top Layer w0.203: U1_M1.8 49.522,65.3 47.543,63.321 47.543,56.928 50.496,53.975 LED1_A1.2
OUT1_D12: LED1_A2.2 U1_M2.8 | length 18.2
  Top Layer w0.203: U1_M2.8 63.522,65.3 63.318,65.095 63.318,59.154 68.496,53.975 LED1_A2.2
OUT1_D13: LED1_A3.2 U1_M3.5 | length 5.6
  Top Layer w0.203: LED1_A3.2 86.496,51.746 v1(86.5,51.75)
  Bottom Layer w0.203: U1_M3.5 84.25,54 v1(86.5,51.75)
OUT1_D14: LED1_A4.2 U1_M4.8 | length 21.3
  Top Layer w0.203: U1_M4.8 69.7,76.434 70.414,75.719 73.337,75.719 74.563,74.494 78.494,74.494 82.824,78.824 85.377,78.824 86.496,77.705 LED1_A4.2
OUT2_D11: LED2_A1.4 U1_M1.5 | length 20.1
  Top Layer w0.203: LED2_A1.4 47.978,54.769 46.324,56.423 46.324,64.052 49.522,67.25 U1_M1.5
OUT2_D12: LED2_A2.4 U1_M2.5 | length 20.3
  Top Layer w0.203: U1_M2.5 63.522,67.25 62.098,65.826 62.098,58.649 65.978,54.769 LED2_A2.4
OUT2_D13: LED2_A3.4 U1_M3.8 | length 5.5
  Top Layer w0.203: v1(83.497,51.747) 83.978,51.266 LED2_A3.4
  Bottom Layer w0.203: U1_M3.8 82.3,53.75 82.3,52.944 v1(83.497,51.747)
OUT2_D14: LED2_A4.4 U1_M4.5 | length 20.8
  Top Layer w0.203: U1_M4.5 67.75,76.4 69.65,74.5 72.832,74.5 74.058,73.274 78.999,73.274 83.329,77.604 83.896,77.604 83.978,77.522 LED2_A4.4
OUT3_D11: LED3_A1.1 U1_M1.7 | length 18.5
  Top Layer w0.203: LED3_A1.1 49.5,54.397 47.137,56.76 47.137,63.564 49.522,65.95 U1_M1.7
OUT3_D12: LED3_A2.1 U1_M2.7 | length 18.7
  Top Layer w0.203: U1_M2.7 63.522,65.95 62.911,65.339 62.911,58.985 67.5,54.397 LED3_A2.1
OUT3_D13: LED3_A3.1 U1_M3.6 | length 5.4
  Top Layer w0.203: v1(85.497,51.747) 85.5,51.744 LED3_A3.1
  Bottom Layer w0.203: U1_M3.6 83.6,53.75 85.497,51.853 v1(85.497,51.747)
OUT3_D14: LED3_A4.1 U1_M4.7 | length 21
  Top Layer w0.203: U1_M4.7 69.05,76.4 70.137,75.313 73.169,75.313 74.394,74.087 78.662,74.087 82.992,78.417 84.933,78.417 85.5,77.85 LED3_A4.1
OUT4_D11: LED2_B1.3 U1_M1.10 | length 6.2
  Top Layer w0.203: LED2_B1.3 48.522,63 49.522,64 U1_M1.10
OUT4_D12: LED2_B2.3 U1_M2.11 | length 5.6
  Top Layer w0.203: U1_M2.11 65.373,63.35 66.522,62.201 LED2_B2.3
OUT4_D13: LED2_B3.3 U1_M3.10 | length 14.6
  Top Layer w0.203: v1(81.158,51.75) 81.158,57.883 83.522,60.248 84.027,60.248 84.522,59.753 LED2_B3.3
  Bottom Layer w0.203: U1_M3.10 81,51.908 v1(81.158,51.75)
OUT4_D14: LED2_B4.3 U1_M4.11 | length 6.3
  Top Layer w0.203: U1_M4.11 71.65,78.5 72.175,79.025 74.305,79.025 75.522,77.809 75.522,77.8 LED2_B4.3
OUT5_D11: LED1_B1.2 U1_M1.12 | length 4.8
  Top Layer w0.203: U1_M1.12 49.585,62.7 49.466,62.581 49.466,61.627 50.496,60.597 LED1_B1.2
OUT5_D12: LED1_B2.2 U1_M2.9 | length 7.6
  Top Layer w0.203: U1_M2.9 65.373,64.65 68.496,61.527 LED1_B2.2
OUT5_D13: LED1_B3.2 U1_M3.12 | length 18.7
  Top Layer w0.203: v1(79.227,51.75) 79.227,57.102 83.186,61.061 85.14,61.061 86.496,59.705 LED1_B3.2
  Bottom Layer w0.203: v1(79.227,51.75) 79.227,51.791 79.7,52.263 U1_M3.12
OUT5_D14: LED1_B4.2 U1_M4.9 | length 10.1
  Top Layer w0.203: U1_M4.9 70.35,78.5 71.688,79.838 75.363,79.838 77.496,77.705 LED1_B4.2
OUT6_D11: LED2_B1.4 U1_M1.9 | length 7.1
  Top Layer w0.203: LED2_B1.4 47.978,63.106 49.522,64.65 U1_M1.9
OUT6_D12: LED2_B2.4 U1_M2.12 | length 4.8
  Top Layer w0.203: U1_M2.12 65.373,62.7 65.978,62.095 LED2_B2.4
OUT6_D13: LED2_B3.4 U1_M3.9 | length 13.1
  Top Layer w0.203: v1(82.123,51.75) 82.123,58.274 83.691,59.841 83.859,59.841 83.978,59.722 LED2_B3.4
  Bottom Layer w0.203: U1_M3.9 81.65,52.263 82.123,51.791 v1(82.123,51.75)
OUT6_D14: LED2_B4.4 U1_M4.12 | length 4.8
  Top Layer w0.203: U1_M4.12 72.3,78.5 72.419,78.619 74.137,78.619 74.978,77.778 LED2_B4.4
OUT7_D11: LED3_B1.1 U1_M1.11 | length 5.3
  Top Layer w0.203: LED3_B1.1 49.5,61.018 49.06,61.458 49.06,62.888 49.522,63.35 U1_M1.11
OUT7_D12: LED3_B2.1 U1_M2.10 | length 6.5
  Top Layer w0.203: U1_M2.10 65.373,64 67.5,61.873 LED3_B2.1
OUT7_D13: LED3_B3.1 U1_M3.11 | length 16.5
  Top Layer w0.203: v1(80.192,51.75) 80.192,57.493 83.354,60.654 84.696,60.654 85.5,59.85 LED3_B3.1
  Bottom Layer w0.203: v1(80.192,51.75) 80.192,52.735 80.35,52.893 U1_M3.11
OUT7_D14: LED3_B4.1 U1_M4.10 | length 8.1
  Top Layer w0.203: U1_M4.10 71,78.5 71.932,79.432 74.918,79.432 76.5,77.85 LED3_B4.1
OUT8_D11: LED2_C1.3 U1_M1.15 | length 16
  Top Layer w0.203: LED2_C1.3 57.522,54.799 55.73,56.591 55.73,62.944 56.787,64 U1_M1.15
OUT8_D12: LED2_C2.3 U1_M2.14 | length 15.4
  Top Layer w0.203: U1_M2.14 72.638,63.35 73.73,62.257 73.73,56.591 75.522,54.799 LED2_C2.3
OUT8_D13: LED2_C3.3 U1_M3.14 | length 12
  Top Layer w0.203: v1(75.5,70) 75.511,69.989 75.511,68.123 LED2_C3.3
  Bottom Layer w0.203: v1(75.5,70) 76,70 80.35,65.65 U1_M3.14
OUT8_D14: LED2_C4.3 U1_M4.15 | length 17.9
  Top Layer w0.203: U1_M4.15 71,83.67 72.082,82.587 79.037,82.587 83.797,87.347 84.027,87.347 84.522,86.852 84.522,86.813 LED2_C4.3
OUT9_D11: LED1_C1.2 U1_M1.13 | length 14.7
  Top Layer w0.203: U1_M1.13 56.787,62.7 56.543,62.456 56.543,56.928 59.496,53.975 LED1_C1.2
OUT9_D12: LED1_C2.2 U1_M2.16 | length 17.3
  Top Layer w0.203: U1_M2.16 72.638,64.65 74.543,62.745 74.543,56.928 77.496,53.975 LED1_C2.2
OUT9_D13: LED1_C3.2 U1_M3.16 | length 11.6
  Top Layer w0.203: LED1_C3.2 77.496,68.996 v1(78.5,70)
  Bottom Layer w0.203: v1(78.5,70) 79,70 81.65,67.35 U1_M3.16
OUT9_D14: LED1_C4.2 U1_M4.13 | length 18.5
  Top Layer w0.203: U1_M4.13 72.3,83.519 72.419,83.4 78.7,83.4 83.46,88.16 85.041,88.16 86.496,86.705 LED1_C4.2
OUT10_D11: LED2_C1.4 U1_M1.16 | length 16.8
  Top Layer w0.203: LED2_C1.4 56.978,54.769 55.324,56.423 55.324,63.187 56.787,64.65 U1_M1.16
OUT10_D12: LED2_C2.4 U1_M2.13 | length 14.5
  Top Layer w0.203: U1_M2.13 72.638,62.7 73.324,62.014 73.324,56.423 74.978,54.769 LED2_C2.4
OUT10_D13: LED2_C3.4 U1_M3.13 | length 13.3
  Top Layer w0.203: v1(74,70) 74.5,70 74.98,69.52 74.98,68.102 LED2_C3.4
  Bottom Layer w0.203: v1(74,70) 76.386,67.614 77.377,67.614 79.7,65.292 U1_M3.13
OUT10_D14: LED2_C4.4 U1_M4.16 | length 17.9
  Top Layer w0.203: U1_M4.16 70.35,83.745 71.914,82.181 79.205,82.181 83.846,86.822 83.978,86.822 LED2_C4.4
OUT11_D11: LED3_C1.1 U1_M1.14 | length 15.2
  Top Layer w0.203: U1_M1.14 56.787,63.35 56.137,62.7 56.137,56.76 58.5,54.397 LED3_C1.1
OUT11_D12: LED3_C2.1 U1_M2.15 | length 16.2
  Top Layer w0.203: U1_M2.15 72.638,64 74.137,62.501 74.137,56.76 76.5,54.397 LED3_C2.1
OUT11_D13: LED3_C3.1 U1_M3.15 | length 11.6
  Top Layer w0.203: LED3_C3.1 76.5,69.5 v1(77,70)
  Bottom Layer w0.203: v1(77,70) 77.5,70 81,66.5 U1_M3.15
OUT11_D14: LED3_C4.1 U1_M4.14 | length 18.1
  Top Layer w0.203: U1_M4.14 71.65,83.594 72.251,82.994 78.868,82.994 83.629,87.754 84.596,87.754 85.5,86.85 LED3_C4.1
OUT12_D11: LED2_D1.3 U1_M1.18 | length 8.7
  Top Layer w0.203: LED2_D1.3 57.522,60.463 59.249,62.19 59.249,65.339 58.638,65.95 U1_M1.18
OUT12_D12: LED2_D2.3 U1_M2.18 | length 9
  Top Layer w0.203: U1_M2.18 72.638,65.95 75.522,63.065 LED2_D2.3
OUT12_D13: LED2_D3.3 U1_M3.18 | length 10.3
  Top Layer w0.203: v1(84,70) 84.522,69.478 LED2_D3.3
  Bottom Layer w0.203: U1_M3.18 82.95,68.95 v1(84,70)
OUT12_D14: LED2_D4.3 U1_M4.18 | length 9.3
  Top Layer w0.203: U1_M4.18 69.05,85.765 70.733,87.447 75.027,87.447 75.522,86.952 75.522,86.913 LED2_D4.3
OUT13_D11: LED1_D1.2 U1_M1.20 | length 9.8
  Top Layer w0.203: U1_M1.20 58.638,67.25 60.062,65.826 60.062,61.853 59.496,61.287 LED1_D1.2
OUT13_D12: LED1_D2.2 U1_M2.20 | length 11.2
  Top Layer w0.203: U1_M2.20 72.638,67.25 77.5,62.388 LED1_D2.2@77.5,59.027
OUT13_D13: LED1_D3.2 U1_M3.20 | length 10.9
  Top Layer w0.203: LED1_D3.2 86.496,69.496 v1(87,70)
  Bottom Layer w0.203: U1_M3.20 84.25,67.25 v1(87,70)
OUT13_D14: LED1_D4.2 U1_M4.20 | length 13.1
  Top Layer w0.203: U1_M4.20 67.75,85.765 70.245,88.26 76.145,88.26 77.496,86.91 77.496,86.904 LED1_D4.2
OUT14_D11: LED2_D1.4 U1_M1.17 | length 8
  Top Layer w0.203: LED2_D1.4 56.978,60.493 58.843,62.358 58.843,65.095 58.638,65.3 U1_M1.17
OUT14_D12: LED2_D2.4 U1_M2.17 | length 8.1
  Top Layer w0.203: U1_M2.17 72.638,65.3 74.978,62.96 LED2_D2.4
OUT14_D13: LED2_D3.4 U1_M3.17 | length 10.4
  Top Layer w0.203: v1(82.5,70) 83.978,68.522 LED2_D3.4
  Bottom Layer w0.203: U1_M3.17 82.3,69.649 82.5,69.849 v1(82.5,70)
OUT14_D14: LED2_D4.4 U1_M4.17 | length 7.7
  Top Layer w0.203: U1_M4.17 69.7,85.765 70.976,87.041 74.859,87.041 74.978,86.922 LED2_D4.4
OUT15_D11: LED3_D1.1 U1_M1.19 | length 9.1
  Top Layer w0.203: U1_M1.19 58.638,66.6 59.655,65.582 59.655,62.021 58.5,60.866 LED3_D1.1
OUT15_D12: LED3_D2.1 U1_M2.19 | length 9.8
  Top Layer w0.203: U1_M2.19 72.638,66.6 76.5,62.738 LED3_D2.1
OUT15_D13: LED3_D3.1 U1_M3.19 | length 10.2
  Top Layer w0.203: LED3_D3.1@85.51,68.31 v1(85.51,69.976)
  Bottom Layer w0.203: U1_M3.19 83.6,68.065 v1(85.51,69.976)
OUT15_D14: LED3_D4.1 U1_M4.19 | length 11
  Top Layer w0.203: U1_M4.19 68.4,85.765 70.489,87.854 75.496,87.854 76.5,86.85 LED3_D4.1
SCL: P1.4 TP3.1 U1_M1.3 U1_M2.3 U1_M3.3 U1_M4.3 | length 77.1
  Top Layer w0.203: v1(53,67.5) 51.95,68.55 49.185,68.55 48.085,69.65 48.085,75.585 49.9,77.4 54.32,77.4 P1.4 ; P1.4@55.569,79 P1.4 ; TP3.1@55.9,83.98 55.9,79.02 P1.4 ; U1_M2.3 66.4,68.55 66.45,68.5 ; U1_M4.3 66.45,75.238 66.486,75.202 66.486,68.536 66.45,68.5 ; v1(66.994,67.494) 66.994,67.506 66.45,68.05 66.45,68.5
  Bottom Layer w0.203: v1(53,67.5) 53.003,67.497 66.991,67.497 v1(66.994,67.494) ; v1@67,67.5 67.006,67.494 69.931,67.494 78.644,58.781 83.035,58.781 85.55,56.266 U1_M3.3
SDA_M1: P1.5 TP4.1 U1_M1.2 | length 24.2
  Top Layer w0.203: U1_M1.2 49.11,69.2 48.491,69.819 48.491,75.291 50.1,76.9 56.36,76.9 P1.5 58.42,79.04 TP4.1@58.42,83.96
SDA_M2: TP5.1 U1_M1.22 U1_M2.2 | length 9.8
  Top Layer w0.203: U1_M1.22 60.019,68.55 60.969,69.5 62.5,69.5 62.8,69.2 U1_M2.2
  Top Layer w0.254: 60.969,69.5 61,69.531 TP5.1
SDA_M3: TP6.1 U1_M2.22 U1_M3.2 | length 33.3
  Top Layer w0.203: TP6.1 v2(65.6,72) ; v1(69.5,68.5) 69.525,68.525 71.687,68.525 U1_M2.22
  Bottom Layer w0.203: v2(65.6,72) 65.707,72.107 65.875,72.107 65.884,72.116 v1(69.5,68.5) 78.813,59.187 83.204,59.187 86.2,56.191 U1_M3.2
SDA_M4: TP7.1 U1_M3.22 U1_M4.2 | length 34.4
  Top Layer w0.203: TP7.1 v1(65.8,74) U1_M4.2
  Bottom Layer w0.203: v1(65.8,74) 65.899,73.901 65.899,73.213 79.518,59.594 84.494,59.594 85.55,60.65 U1_M3.22
SERIAL-OUT_M4: TP8.1 U1_M4.22 | length 3.3
  Top Layer w0.203: U1_M4.22 66.45,87.35 66.5,87.4 TP8.1
pads on no net: LED1_A1.3 LED1_A1.4 LED1_A2.3 LED1_A2.4 LED1_A3.3 LED1_A3.4 LED1_A4.3 LED1_A4.4 LED1_B1.3 LED1_B1.4 LED1_B2.3 LED1_B2.4 LED1_B3.3 LED1_B3.4 LED1_B4.3 LED1_B4.4 LED1_C1.3 LED1_C1.4 LED1_C2.3 LED1_C2.4 LED1_C3.3 LED1_C3.4 LED1_C4.3 LED1_C4.4 LED1_D1.3 LED1_D1.4 LED1_D2.3 LED1_D2.4 LED1_D3.3 LED1_D3.4 LED1_D4.3 LED1_D4.4

## Polygon pours and split planes (outlines as drawn)
GND on Bottom Layer "GND_L02_P003" (solid, remove dead copper, pour order 3): 45,90 90,90 90,45 45,45
GND on Top Layer "GND_L01_P004" (solid, pour order 4): 45,90 90,90 90,45 45,45

## Silkscreen, mask and mechanical layers (free items; w line width, h text height)
Layout:
  the board outline again, w0.25

## Text inside footprints (layer, text, board x,y; h text height)
U1_M1: Top Overlay "*" at 49.876,70.155 h1.27; Top Assembly "*" at 51.35,69.183 h1.27
U1_M2: Top Overlay "*" at 63.876,70.155 h1.27; Top Assembly "*" at 65.35,69.183 h1.27
U1_M3: Bottom Overlay "*" at 87.155,54.376 h1.27 r270; Bottom Assembly "*" at 86.183,55.85 h1.27 r270
U1_M4: Top Overlay "*" at 64.845,76.876 h1.27 r90; Top Assembly "*" at 65.817,78.35 h1.27 r90